# Altium PCB Qadrature FM demodulator.PcbDoc (part 2 of 2)
Units mm, origin at the board's own origin, x right, y up, seen from the top; angles counter-clockwise.
Board outline 65 x 50 mm, 2 copper layers (Top Layer, Bottom Layer); 40 components, 19 nets, 115 pads, 103 vias.
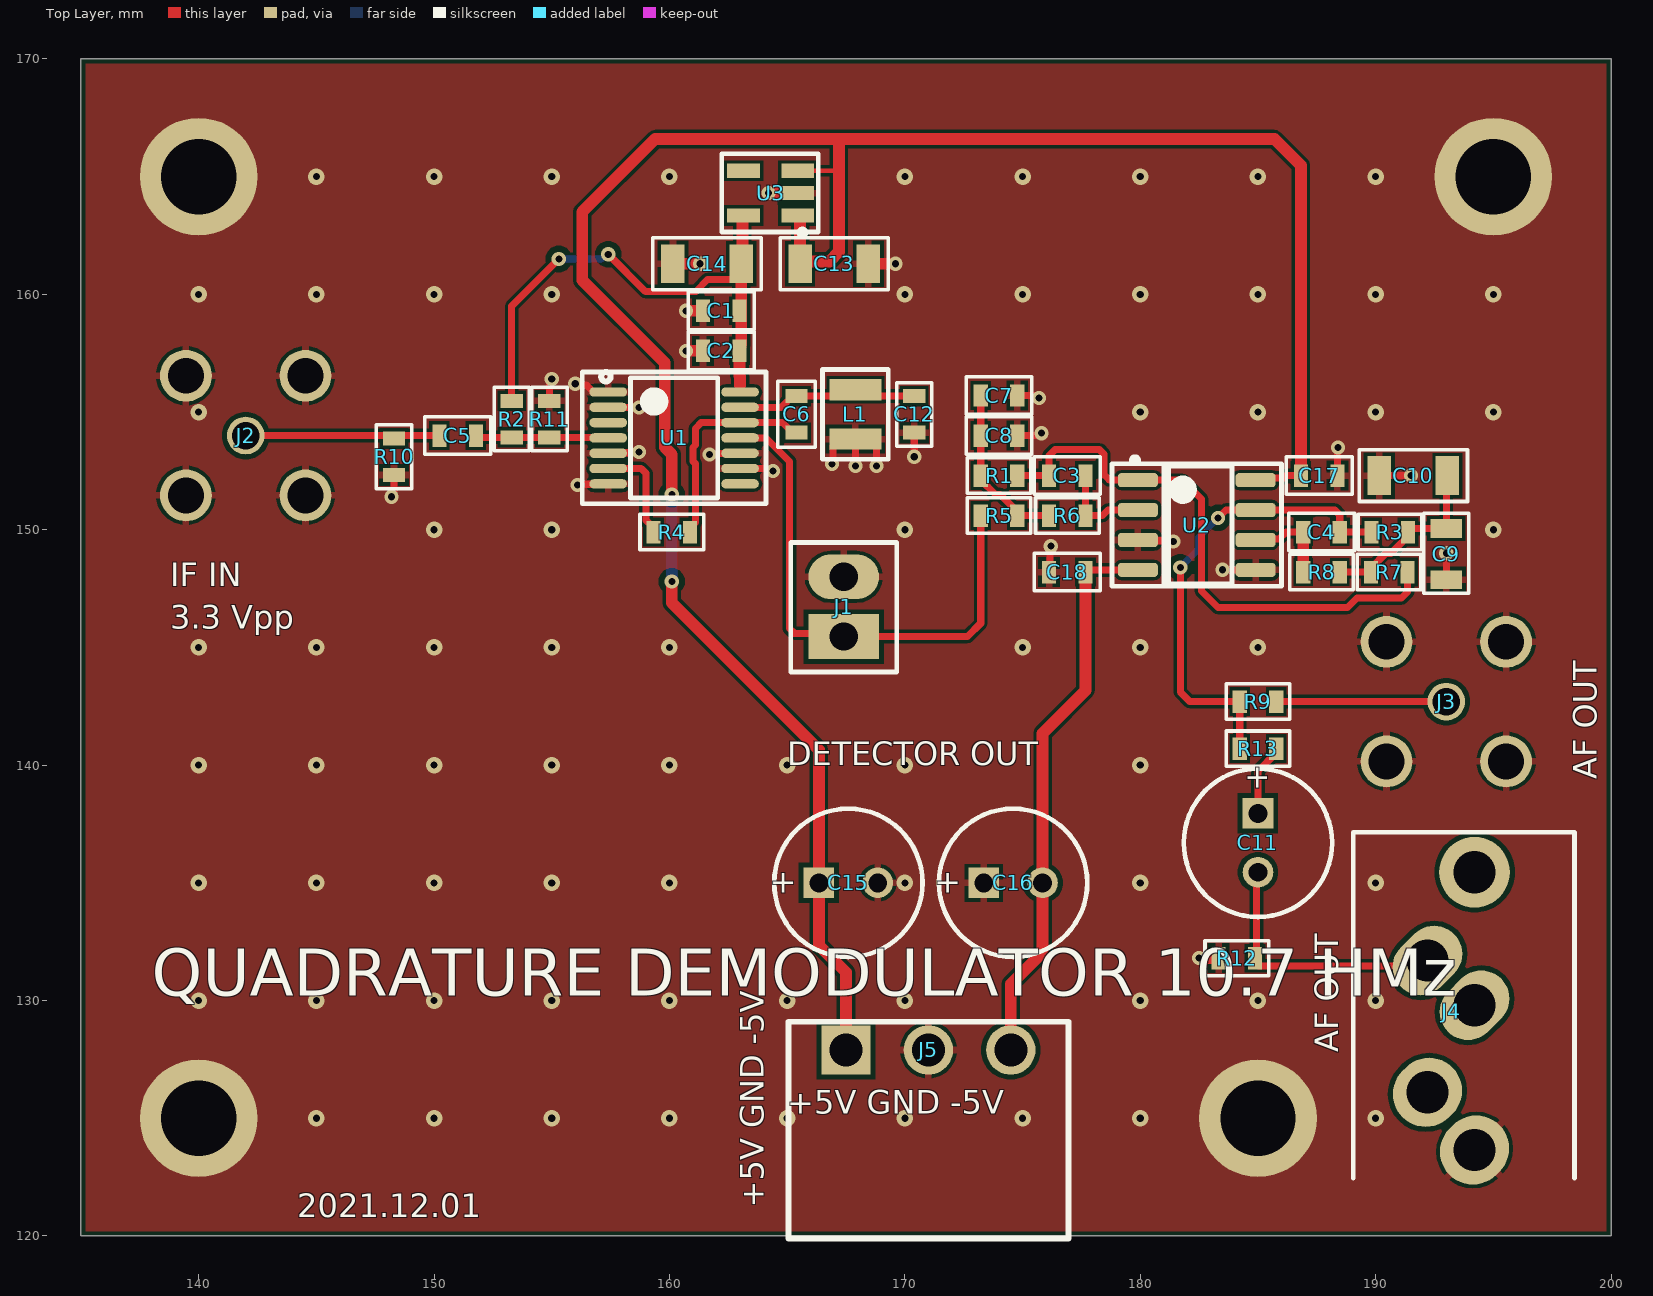
[diagram p0: Top Layer view]

## Via types
v1: diameter 0.7, hole 0.3, Top Layer to Bottom Layer, 71 vias
v2: diameter 0.6, hole 0.3, Top Layer to Bottom Layer, 32 vias

## Nets (pads, with @x,y where several pads share a name; then routed paths per layer and width w, separated by ;. In a path a pad name is that pad's centre, name@x,y a point inside that pad or via, vN(x,y) a via of type N, cw(c..) or ccw(c..) an arc to the next point about the centre after c; other vN are vias at no path point) (continued)
NetC5_2: (continued)
  Top Layer w0.3: C5.2 151.85,153.925 R2.1 R11.2 154.913,153.912 157.387,153.912 U1.4
NetC6_1: C6.1 C12.2 L1.1 U1.13 | length 7.6
  Top Layer w0.3: U1.13 164.75,155.2 165.225,155.675 C6.1 C12.2
NetC6_2: C6.2 R4.2 U1.12 | length 9.2
  Top Layer w0.3: R4.2 160.875,150.075 161.1,150.3 161.1,152.804 160.996,152.908 160.996,153.492 161.1,153.596 161.1,154.3 161.35,154.55 U1.12 164.8,154.55 165.225,154.125 C6.2
NetC7_2: C7.2 C8.2 R1.1 R5.2 R6.1 | length 7.2
  Top Layer w0.3: C7.2 C8.2 R1.1 173.225,152.125 173.85,151.5 174.05,151.5 174.775,150.775 R5.2 R6.1
NetC9_2: C9.2 C10.2 R3.1 R7.2 R8.1 | length 7.8
  Top Layer w0.3: R8.1 R7.2 189.8,148.375 190.425,149 190.65,149 191.375,149.725 R3.1 191.525,150.05 C9.2 193,152.25 C10.2
NetC11_1: C11.1 R13.1 | length 3.1
  Top Layer w0.3: C11.1 185,139.75 185.775,140.525 R13.1
NetC11_2: C11.2 J4.4 R12.2 | length 11.4
  Top Layer w0.3: C11.2 184.937,135.387 184.937,131.862 R12.2 184.875,131.625 185.025,131.475 191.975,131.475 J4.4
NetJ1_1: J1.1 R5.1 U1.11 | length 22.7
  Top Layer w0.3: U1.11 164.1,153.9 165.1,152.9 165.1,145.8 165.3,145.6 167.26,145.6 J1.1 172.66,145.46 173.225,146.025 R5.1
NetJ3_1: J3.1 R9.2 | length 7.2
  Top Layer w0.3: R9.2 J3.1
NetR4_1: R4.1 U1.6 | length 4.3
  Top Layer w0.3: U1.6 158.8,152.6 159,152.4 159,150.4 159.325,150.075 R4.1
pads on no net: J4.2 J4.3 J4.5 U1.3 U1.8 U3.4

## Polygon pours and split planes (outlines as drawn)
GND on Bottom Layer "GND_L02_P000" (solid, remove dead copper, pour order 0): 135.2,120.2 135.2,169.8 199.8,169.8 199.8,120.2 197.2,120.2
GND on Top Layer "GND_L01_P001" (solid, remove dead copper, pour order 1): 135.2,120.2 135.2,169.8 199.8,169.8 199.8,120.2 196,120.2

## Silkscreen, mask and mechanical layers (free items; w line width, h text height)
Top Overlay:
  text "IF IN" at 138.8,147.6 h1
  text "3.3 Vpp" at 138.8,145.8 h1
  text "DETECTOR OUT" at 165,140 h1
  text "AF OUT" at 199.4,139.4 h1 r90
  text "QUADRATURE DEMODULATOR 10.7 HMz" at 138,130.2 h2
  text "AF OUT" at 188.4,127.8 h1 r90
  text "+5V GND -5V" at 165,125.2 h1
  text "+5V GND -5V" at 164,121.2 h1 r90
  text "2021.12.01" at 144.2,120.8 h1
Mechanical 1:
  the board outline again, w0.2

## Text inside footprints (layer, text, board x,y; h text height)
C11: Top Overlay "+" at 185.4,138.9 h1 r90
C15: Top Overlay "+" at 165.4,135.4 h1 r180
C16: Top Overlay "+" at 172.4,135.4 h1 r180